# Altium PCB E77R.PcbDoc
Units mm, origin at the board's own origin, x right, y up, seen from the top; angles counter-clockwise.
Board outline 25 x 100 mm, 2 copper layers (Top Layer, Bottom Layer); 52 components, 33 nets, 183 pads, 226 vias.
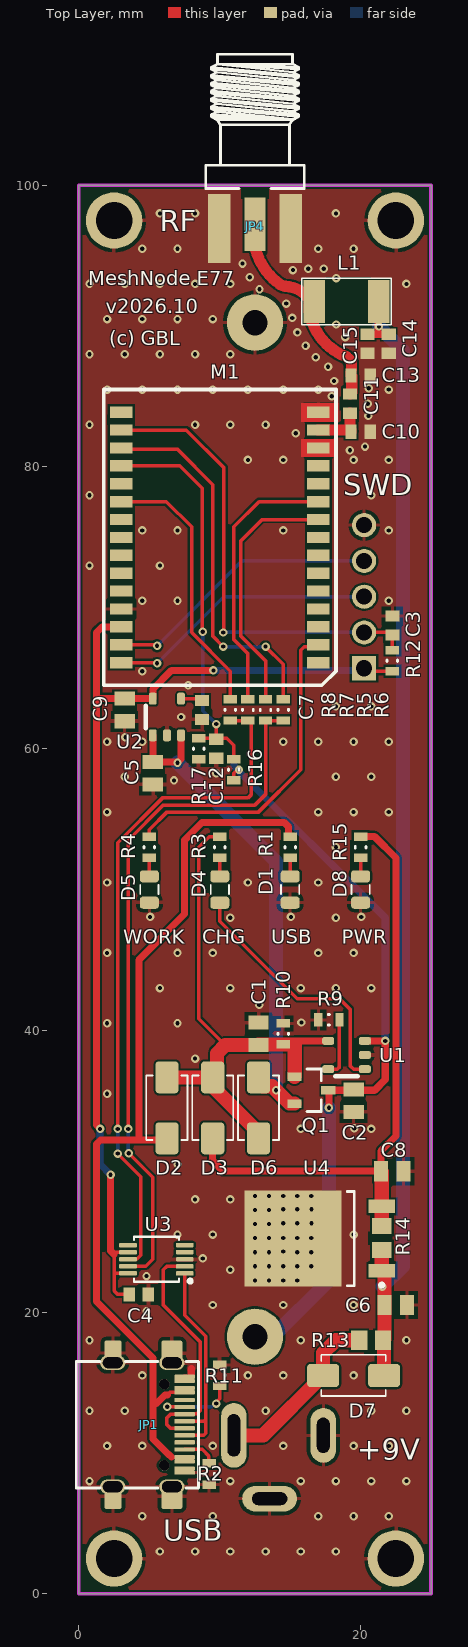
[diagram p0: Top Layer view]
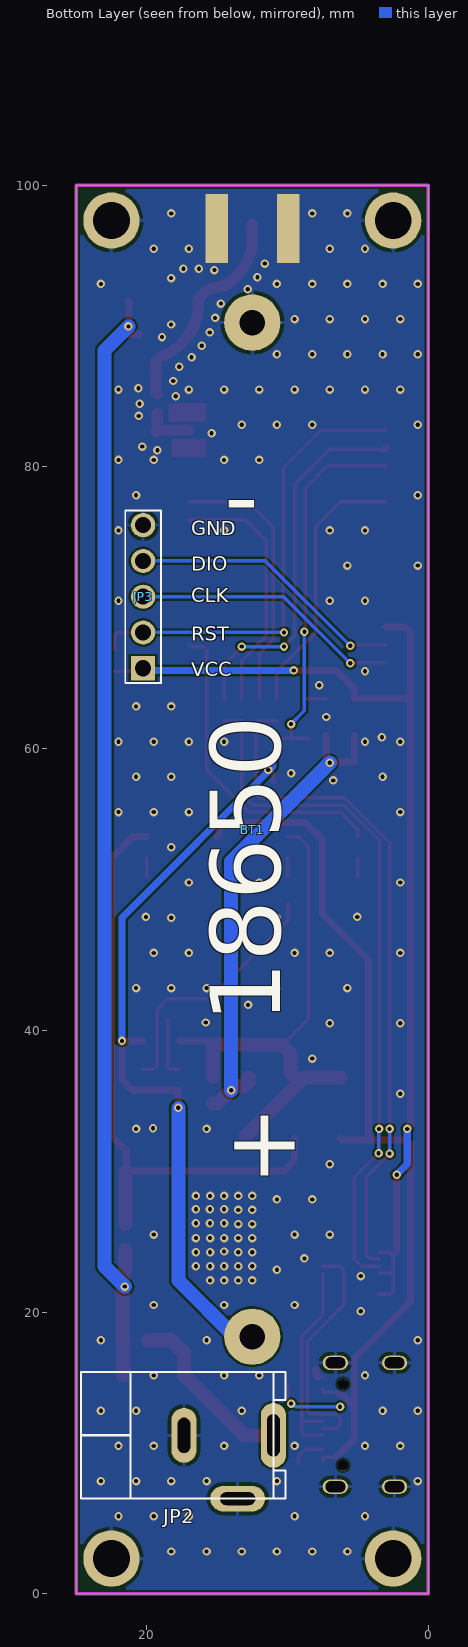
[diagram p1: Bottom Layer view, seen from below]
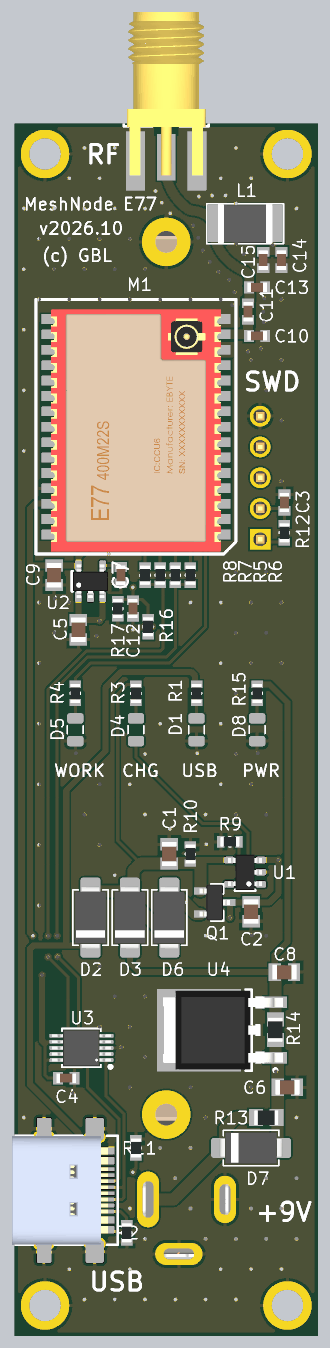
[diagram p2: 3D render of the assembled board from above, using the file's embedded part models]
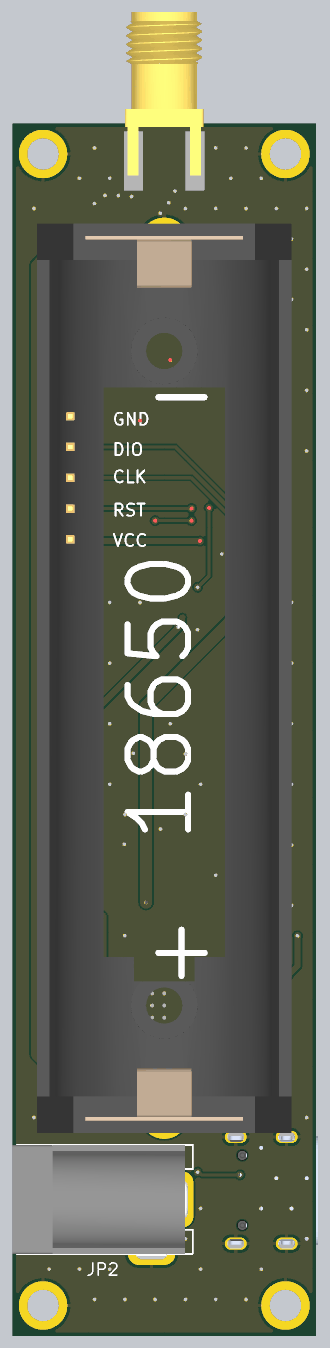
[diagram p3: 3D render of the assembled board from below, using the file's embedded part models]

## Layer stack, top to bottom
Top Solder: solder mask 0.0102, Solder Resist, Dk 3.5
Top Layer: signal copper 0.0356
Dielectric 1: dielectric 0.32, FR-4, Dk 4.8
Bottom Layer: signal copper 0.0356
Bottom Solder: solder mask 0.0102, Solder Resist, Dk 3.5

## Board outline
0,0 0,100 25,100 25,0

## Design rules (kind name [scope] priority, off if disabled: settings)
Clearance [All] p1: gap=0.15 ignorepadtopadclearanceinfootprint=FALSE
ComponentClearance ComponentClearance_1 [InComponent('JP3') vs InComponent('BT1')] p1: gap=-10 collisioncheckmode=3 verticalgap=-10 showdistances=FALSE
ComponentClearance [All] p2: gap=0.254 collisioncheckmode=3 verticalgap=0.254 showdistances=FALSE
HoleSize [All] p1: absolutevalues=TRUE maxlimit=5 minlimit=0.025 maxpercent=80.000 minpercent=20.000
MinimumSolderMaskSliver [All] p1: minsoldermaskwidth=0.05
PolygonConnect PolygonConnect_3 [InComponent('U4') vs IsNamedPolygon('GND_L01_P001')] p1: connectstyle=Direct reliefconductorwidth=0.254 reliefentries=4 polygonreliefangle="90 Angle" airgapwidth=0.254
PolygonConnect PolygonConnect_2 [InComponent('JP4') or InComponent('C14') or InComponent('C15') or InComponent('C13') or InComponent('C10') vs IsNamedPolygon('GND_L01_P001') Or IsNamedPolygon('GND_L02_P000')] p2: connectstyle=Direct reliefconductorwidth=0.254 reliefentries=4 polygonreliefangle="90 Angle" airgapwidth=0.254
PolygonConnect PolygonConnect_1 [All vs IsNamedPolygon('GND_L01_P001') Or IsNamedPolygon('GND_L02_P000')] p3: thpad.connectstyle=Relief thpad.reliefconductorwidth=0.254 thpad.reliefentries=4 thpad.polygonreliefangle="90 Angle" thpad.airgapwidth=0.254 smdpad.connectstyle=Relief smdpad.reliefconductorwidth=0.254 smdpad.reliefentries=4 smdpad.polygonreliefangle="90 Angle" smdpad.airgapwidth=0.254 via.connectstyle=Direct via.reliefconductorwidth=0.254 via.reliefentries=4 via.polygonreliefangle="90 Angle" via.airgapwidth=0.254
PolygonConnect [All] p4: connectstyle=Relief reliefconductorwidth=0.254 reliefentries=4 polygonreliefangle="90 Angle" airgapwidth=0.254
RoutingVias [All] p1: holewidth=0.711 width=1.27 viastyle="Through Hole" minholewidth=0.711 minwidth=1.27 maxholewidth=0.711 maxwidth=1.27
SilkToSilkClearance [All] p1: silktosilkclearance=0.1
SilkToSolderMaskClearance [IsPad] p1: minsilkscreentomaskgap=0.05 clearancetoexposedcopper=TRUE
SolderMaskExpansion [All] p1: expansion=0 istentingtop=FALSE
SupplyNets "Schematic Supply Nets_6" [InNet('VBUS')] p1: voltage=0.000
SupplyNets "Schematic Supply Nets_5" [InNet('+5V')] p2: voltage=0.000
SupplyNets "Schematic Supply Nets_4" [InNet('V_IN')] p3: voltage=0.000
SupplyNets "Schematic Supply Nets_3" [InNet('V_BATT')] p4: voltage=0.000
SupplyNets "Schematic Supply Nets_2" [InNet('+9V')] p5: voltage=0.000
SupplyNets "Schematic Supply Nets_1" [InNet('VCC')] p6: voltage=0.000
SupplyNets "Schematic Supply Nets" [InNet('GND')] p7: voltage=0.000
Width [All] p1: maxlimit=2 minlimit=0.2 preferedwidth=0.25
25 further rules are at their usual default settings.

## Classes and differential pairs
component class E77R: BT1 C1 C2 C3 C4 C5 C6 C7 C8 C9 C10 C11 C12 C13 C14 C15 D1 D2 D3 D4 D5 D6 D7 D8 JP1 JP2 JP3 JP4 L1 M1 Q1 R1 R3 R6 R9 R13 R16 R17 U1 U2 U3 U4

## Components (designator, comment, footprint, x,y, rotation, side; value= is the part's Value field where it differs from the comment)
BT1 "18650" 18650 12.5,54.25 r90 bottom locked
C1 "10uF" C-0805 12.75,39.75 r90 top
C2 "10uF" C-0805 19.5,35 r90 top
C3 "100nF" C-0603 22.25,68.75 r270 top
C4 "100nF" C-0603 4.25,21.25 r180 top
C5 "10uF" C-0805 5.25,58.25 r270 top
C6 "10uF" C-0805 22.5,20.5 r0 top
C7 "nc" C-0603 8.75,62.75 r270 top
C8 "10uF" C-0805 22.25,30 r0 top
C9 "10uF" C-0805 3.25,62.75 r270 top
C10 "nc" C-0603 20,82.5 r180 top
C11 "100pF" C-0603 19.25,84.5 r90 top
C12 "100nF" C-0603 9.75,60 r90 top
C13 "nc" C-0603 20,86.5 r180 top
C14 "100pF" C-0603 22,88.75 r270 top
C15 "100nF" C-0603 20.5,88.75 r90 top
D1 "DLED" LED0805 15,50 r270 top locked
D2 "SS14" D-SMA 6.25,34.5 r90 top
D3 "SS14" D-SMA 9.5,34.5 r90 top
D4 "DLED" LED0805 10,50 r270 top locked
D5 "DLED" LED0805 5,50 r270 top locked
D6 "SS14" D-SMA 12.75,34.5 r90 top
D7 "SS14" D-SMA 19.5,15.5 r0 top
D8 "DLED" LED0805 20,50 r270 top locked
JP1 "L-KLS1-5473" USB_C_SMD_SLOT 7.5,12 r270 top locked
JP2 "POWER" DC-140-003 11,11.25 r90 bottom
JP3 "HEADER 5" PLS1-5 20.25,65.71 r90 bottom locked
JP4 "EM-SA071-GGT" SMA_F_EDGE 12.5,98.5 r270 top locked
L1 "L" SCI1812 19,91.75 r180 top
M1 "E77-400M22S" E77XX-M22 10,75 r180 top locked
Q1 "IRLML6401" SOT-23 16.5,35.75 r0 top
R1 "1k" R-0603 15,53 r90 top
R2 "nc" R-0603 9.25,8.5 r270 top
R3 "1k" R-0603 10,53 r270 top
R4 "470" R-0603 5,53 r90 top
R5 "nc" R-0603 13.25,62.75 r270 top
R6 "nc" R-0603 14.5,62.75 r270 top
R7 "nc" R-0603 12,62.75 r270 top
R8 "nc" R-0603 10.75,62.75 r270 top
R9 "4k7" R-0603 17.75,40.75 r0 top
R10 "10k" R-0603 14.5,39.75 r270 top
R11 "nc" R-0603 10,15.5 r90 top
R12 "10k" R-0603 22.25,66.25 r270 top
R13 "nc" R-0805 20.75,18 r180 top
R14 "nc" R-0805 21.5,25.25 r270 top
R15 "1k" R-0603 20,53 r90 top
R16 "1M" R-0603 11,58.5 r270 top
R17 "1M" R-0603 8.5,60 r90 top
U1 "MCP73831-2ATI/OT" SOT-23-5 19,38.25 r180 top value={Value}
U2 "LP5907MFX-3.0" SOT-23-5 6.25,62.25 r90 top
U3 "CH340E" MSOP-10 5.5,23.75 r90 top value={Value}
U4 "78M05" DPAK3 15.195,25.22 r180 top

## Footprints (in the part's own frame and the unit in brackets; to place one, negate y for a bottom-side part, rotate by r counter-clockwise, add the part's x,y. Pads: shape width x height; smd on the part's side, far side on the other; paste and mask are expansions set on the pad)
18650 [mm]
  round 4 hole 1.8: 1(-36,0) 2(36,0)
  body extent -37.5,-10.5 37.5,10.5, height 21
C-0603 [mm] "Chip Capacitor, 2-Leads, Body 1,60x0,80mm, IPC Medium Density"
  rect 0.8x1 smd: 1(-0.675,0) 2(0.675,0)
  body extent -0.8,-0.4 0.8,0.4, height 0.8
C-0805 [mm] "Chip Capacitor, 2-Leads, Body 2,00x1,25mm, IPC Medium Density"
  rect 1x1.45 smd: 1(-0.8,0) 2(0.8,0)
  body extent -1,-0.62 1,0.63, height 1.25
D-SMA [mm] "Diode, Molded Body; 4.315 mm L X 2.605 mm W X 2.41 mm H body"
  rrect30% 2.27x1.65 smd: 1(-2.165,0) 2(2.165,0)
  silkscreen extent -2.29,-1.46 2.29,1.46, body extent -2.61,-1.3 2.61,1.3, height 2.41
DC-140-003 [mm]
  oval 4.6x1.8 hole 0.9 slot 3 at 0 deg: 1(0,0)
  oval 3.9x1.8 hole 0.9 slot 2.5 at 0 deg: 2(0,6.35)
  oval 1.8x3.9 hole 0.9 slot 2.5 at 90 deg: 3(-4.5,2.54)
  silkscreen extent -4.5,-0.85 4.5,13.65, body extent -4.76,-0.45 4.5,14, height 11.85
DPAK3 [mm]
  rect 1.9x0.95 smd: 1(-6.305,2.28) 2(-6.305,-2.28)
  rect 6.9x6.8 smd: 3(-0.005,0)
  silkscreen extent -6.43,-3.35 -3.85,3.43, body extent -6.95,-3.25 2.95,3.25, height 2.32
E77XX-M22 [mm]
  rect 1.6x0.8 smd: 1(-7,8.89) 2(-7,7.62) 3(-7,6.35) 4(-7,5.08) 5(-7,3.81) 6(-7,2.54) 7(-7,1.27) 8(-7,0) 9(-7,-1.27) 10(-7,-2.54) 11(-7,-3.81) 12(-7,-5.08) 13(-7,-6.35) 14(-7,-7.62) 15(-7,-8.89) 16(7,-8.89) 17(7,-7.62) 18(7,-6.35) 19(7,-5.08) 20(7,-3.81) 21(7,-2.54) 22(7,-1.27) 23(7,0) 24(7,1.27) 25(7,2.54) 26(7,3.81) 27(7,5.08) 28(7,6.35) 29(7,7.62) 30(7,8.89)
  silkscreen extent -8.25,-10.5 8.25,10.5, body extent -7,-9.68 7,10.3, height 2.7
LED0805 [mm] "LED, Chip; 2.00 mm L X 1.25 mm W X 0.80 mm H body"
  rrect51% 0.86x1.35 smd: 1(-0.935,0) 2(0.935,0)
  silkscreen extent -0.33,-0.65 0.33,0.65, body extent -1,-0.63 1,0.63, height 0.25
MSOP-10 [mm] "Small Outline Pkg (SOP), 0.50 mm pitch; 10 pin, 3.00 mm L X 3.00 mm W X 1.10 mm H body"
  rrect52% 0.31x1.27 smd: 1(-1,-2.015) 2(-0.5,-2.015) 3(0,-2.015) 4(0.5,-2.015) 5(1,-2.015) 6(1,2.015) 7(0.5,2.015) 8(0,2.015) 9(-0.5,2.015) 10(-1,2.015)
  silkscreen extent -1.68,-2.53 1.6,1.6, body extent -1.5,-2.42 1.5,2.42, height 1.1
PLS1-5 [mm] "Header, Vertical, 2.54 mm pitch; 0.70 mm lead width, 5 pins, 1 row, 5 pins per row, 11.43 mm L X 2.54 mm W X 7.54 mm H body"
  rect 1.71x1.71 hole 1.14 paste-2539.97: 1(0,0)
  round 1.71 hole 1.14 paste-2539.97: 2(2.54,0) 3(5.08,0) 4(7.62,0) 5(10.16,0)
  silkscreen extent -1.04,-1.27 11.2,1.27, body extent -0.64,-1.27 10.79,1.27, height 7.54
R-0603 [mm] "Chip Resistor, 2-Leads, Body 1,60x0,82mm, IPC Medium Density"
  rect 0.6x0.95 smd: 1(-0.75,0) 2(0.75,0)
  silkscreen extent -0.05,-0.38 0.05,0.38, body extent -0.8,-0.4 0.8,0.4, height 0.45
R-0805 [mm] "Chip Resistor, 2-Leads, Body 2,00x1,25mm, IPC Medium Density"
  rect 1.15x1.4 smd: 1(-0.85,0) 2(0.85,0)
  body extent -1,-0.6 1,0.6, height 0.45
SCI1812 [mil]
  rect 60x120 smd: 1(-90,0) 2(90,0)
  silkscreen extent -125,-65 125,65, body extent -89,-63 89,63, height 98
SMA_F_EDGE [mm] "SMA End Launch Jack for 1.58mm PCB, 50 Ohm, Flat Tab Contact"
  rect 3.81x1.5 smd: 1(1.27,0)
  rect 4.9x1.6 smd: 2(1.575,2.54) 2(1.575,-2.54)
  rect 4.9x1.6 smd far side: 2(1.575,2.54) 2(1.575,-2.54)
  silkscreen extent -10.81,-3.5 -1.28,3.5, body extent -10.73,-3.25 2.77,3.25, height 3.7
SOT-23 [mm]
  rect 1x0.6 smd: 1(-1.2,0.95) 2(-1.2,-0.95) 3(1.2,0)
  silkscreen extent -0.3,-1.5 0.7,1.5, body extent -1.25,-1.5 1.25,1.5, height 1.2
SOT-23-5 [mm]
  rrect50% 0.85x0.55 smd mask+0.06: 1(-1.3,1) 2(-1.3,0) 3(-1.3,-1) 4(1.3,-1) 5(1.3,1)
  silkscreen extent -0.8,1.5 0.8,1.5, body extent -1.4,-1.45 1.4,1.45, height 1.45
USB_C_SMD_SLOT [mm] "USB 3.1 Type C"
  rrect20% 1.8x1.5 smd mask+0.07: 1(-5.08,-0.9) 1(5.08,-0.9)
  rrect20% 1.8x1.2 smd mask+0.07: 1(-5.08,-5.08) 1(5.08,-5.08)
  oval 1x1.8 hole 0.8 slot 1.4 at 90 deg: 1(-4.4,-0.9) 1(-4.4,-5.1) 1(4.4,-0.9) 1(4.4,-5.1)
  rrect30% 0.3x1.45 smd paste-2 mask+0.07: A1(-3.1,0) A4(-2.6,0) A9(2.6,0) A12(3.4,0) B1(3.1,0) B4(2.3,0) B9(-2.3,0) B12(-3.4,0)
  rrect30% 0.3x1.45 smd mask+0.07: A5(-1.25,0) A6(-0.25,0) A7(0.25,0) A8(1.25,0) B5(1.75,0) B6(0.75,0) B7(-0.75,0) B8(-1.75,0)
  round 0.75 hole 0.75 unplated paste-2539.97 mask+0.07: MH(-2.885,-1.44) MH(2.885,-1.44)
  silkscreen extent -4.5,-7.69 4.5,1, body extent -4.47,-7.7 4.47,0.2, height 3.2

## Part data
BT1: library part Battery, "Multicell Battery", LatestRevisionDate=17-Jul-2002, LatestRevisionNote="Re-released for DXP Platform.", PackageDescription="Battery; 2 Leads", PackageReference=BAT-2, Published=24-Mar-1999, Publisher="Altium Limited"
C1 C2 C3 C4 C5 C6 C7 C8 C9 C10 C11 C12 C13 C14 C15: library part CAPN, Voltage=50V, Вид=Конденсатор, Точність/група=NP0
D2 D3 D6 D7: library part DIODSH, Вид=Діод
JP4: library part SMA, "SMA Female R/A PCB Mount", Вид=Роз'єм
Q1: library part MOSF-P, Вид=Транзистор
R1 R2 R3 R4 R5 R6 R7 R8 R9 R10 R11 R12 R13 R14 R15 R16 R17: library part RES, Вид=Резистор, Точність/група=5%
U1: Man#Part Num#=TPS61023DRLT, Manufacturer="Texas Instruments", Package=SOT-563, Temperature Range="-40°C ~ 125°C (TJ)", Component Type=SMD, Footprint Part=IC-package.PcbLib, IC Type=PMIC, Library Part=IC`s.SchLib, Mounting  Method=SMD, Part Number=MCP73831-2ATI/OT, Part Type=IC, Suplier 1=https://www.digikey.com.au/en/products/detail/texas-instruments/TPS61023DRLT/11310622?s=N4IgTCBcDaICoAUDKA2AjABjAZgCICUAZOEAXQF8g, URL=https://www.ti.com/general/docs/suppproductinfo.tsp?distId=10&gotoUrl=https%3A%2F%2Fwww.ti.com%2Flit%2Fgpn%2Ftps61023
U2: library part LP5907, "250mA Low-Dropout Regulator", Вид=Мікросхема
U4: library part 78M08, Вид=Мікросхема
D1 D4 D5 D8: Вид=Світлодіод
JP1 U3: Mounting  Method=SMD
JP2 JP3: Вид=Роз'єм
L1: Вид=Індуктивність

## Free pads (board coordinates)
  round 4 hole 2.6: 0(2.5,2.5) 0(2.5,97.5) 0(22.5,2.5) 0(22.5,97.5)

## Via types
v1: diameter 0.6, hole 0.3, Top Layer to Bottom Layer, tented both sides, 226 vias

## Nets (pads, with @x,y where several pads share a name; then routed paths per layer and width w, separated by ;. In a path a pad name is that pad's centre, name@x,y a point inside that pad or via, vN(x,y) a via of type N, cw(c..) or ccw(c..) an arc to the next point about the centre after c; other vN are vias at no path point)
+5V: C8.1 D3.1 R14.1 R15.2 U4.2 | length 43.4
  Top Layer w0.5: D3.1 9.5,30.75 10.25,30 C8.1 21.45,31.45 22.5,32.5 22.5,52.25 21,53.75 R15.2
  Top Layer w1: R14.1@21.5,26.25 U4.2 C8.1@21.5,29.95
+9V: C6.1 C14.1 C15.2 D7.2 L1.1 R13.1 R14.2 U4.1 | length 82.3
  Top Layer w0.25: R13.1 R13.1@21.7,18.1
  Top Layer w0.5: C15.2 21.25,89.425 ; L1.1 21.25,91.714 21.25,89.425 ; C14.1 21.25,89.425
  Top Layer w1: R14.2 U4.1 21.7,22.74 R13.1@21.7,18.1 ; D7.2 R13.1@21.665,18
  Bottom Layer w1: v1(21.299,89.983) 23,88.283 23,23.25 v1@21.554,21.804
  other v1: 21.549,21.808
BATT_LEVEL: C12.2 M1.19 R16.1 R17.2 | length 28.3
  Top Layer w0.25: M1.19 7.17,80.08 8.75,78.5 v1@8.75,68.316 ; R17.2 C12.2@9.75,60.75 ; C12.2 C12.2@9.75,60.75 ; v1(9.75,61.75) C12.2@9.75,60.75 ; R16.1 11,60.25 10.5,60.75 C12.2@9.75,60.75
  Bottom Layer w0.25: v1(8.799,68.308) 8.799,62.701 v1(9.75,61.75)
DN: JP1.A7 JP1.B7 U3.2 | length 17.1
  Top Layer w0.25: JP1.A7 6.5,11.75 6.25,12 6.25,12.5 6.5,12.75 JP1.B7 7.525,12.775 8.375,12.775 8.6,13 8.6,17.9 6,20.5 6,23 6.25,23.25 U3.2
DP: JP1.A6 JP1.B6 U3.1 | length 15.1
  Top Layer w0.25: JP1.B6 8.854,11.25 9,11.396 9,12.396 ; JP1.A6 8.854,12.25 9,12.396 ; U3.1 7.515,19.78 9,18.295 9,12.396
GND: BT1.2 C1.2 C2.1 C3.1 C4.1 C5.2 C6.2 C7.2 C8.2 C9.2 C10.1 C12.1 C13.1 C14.2 C15.1 D1.2 D5.2 D8.2 JP1.1 JP1.A1 JP1.A12 JP1.B1 JP1.B12 JP2.2 JP2.3 JP3.5 JP4.2 M1.13 M1.15 M1.27 pad.0 R2.2 R9.1 R10.1 R11.2 R17.1 U1.2 U2.2 U3.3 U4.3 | length 1
  Top Layer w0.3: JP1.B12 JP1.B12@7.875,15.4
  Top Layer w0.5: JP1.B12@7.875,15.4 7.975,15.5 7.975,15.875 8,15.9 8,16
  other v1: 5.75,3 8.25,3 10.75,3 13.25,3 15.75,3 18.25,3 4.5,5.5 9.5,5.5 17,5.5 19.5,5.5 22,5.5 0.75,8 10.75,8 15.75,8 18.25,8 20.75,8 23.25,8 2,10.5 4.5,10.5 9.5,10.5 14.5,10.5 19.5,10.5 22,10.5 0.75,13 3.25,13 13.25,13 20.75,13 23.25,13 4.5,15.5 12,15.5 14.5,15.5 19.5,15.5 0.75,18 15.75,18 23.25,18 4.799,20.058 9.5,20.5 14.5,20.5 19.5,20.5 12.5,22.25 13.5,22.25 14.5,22.25 15.5,22.25 4.799,22.558 10.75,23 12.5,23.25 13.5,23.25 14.5,23.25 15.5,23.25 16.5,23.25 8.799,23.808 12.5,24.25 13.5,24.25 15.5,24.25 16.5,24.25 14.506,24.298 12.5,25.25 13.5,25.25 14.5,25.25 15.5,25.25 16.5,25.25 7,25.5 9.5,25.5 19.5,25.5 12.5,26.25 13.5,26.25 14.506,26.298 15.506,26.298 16.506,26.298 12.5,27.25 13.5,27.25 14.506,27.298 15.506,27.298 16.506,27.298 8.25,28 10.75,28 12.5,28.25 13.5,28.25 14.5,28.25 15.5,28.25 16.5,28.25 7,30.5 15.75,33 20.75,33 19.549,33.058 2,35.5 8.25,38 2,40.5 7,40.5 15.799,40.558 12.799,41.808 5.75,43 10.75,43 15.75,43 18.25,43 20.75,43 2,45.5 7,45.5 9.5,45.5 17,45.5 19.5,45.5 10.75,48 18.25,48 5.049,48.058 15.049,48.058 20.049,48.058 2,50.5 12,50.5 17,50.5 18.25,53 2,55.5 17,55.5 19.5,55.5 22,55.5 6.75,57.75 3.25,58 18.25,58 20.75,58 9.75,58.25 2,60.5 4.5,60.5 14.5,60.5 17,60.5 19.5,60.5 22,60.5 3.299,60.808 7.25,62.25 18.25,63 20.75,63 7.75,64.5 4.5,65.5 4.5,70.5 7,70.5 22,70.5 0.75,73 5.75,73 4.5,75.5 7,75.5 14.5,75.5 22,75.5 0.75,78 20.75,78 12,80.5 14.5,80.5 19.5,80.5 22,80.5 19.24,81.193 20.31,81.449 15.393,82.394 0.75,83 8.25,83 10.75,83 13.25,83 20.557,83.624 20.501,84.497 17.943,85.02 2,85.5 4.5,85.5 7,85.5 9.5,85.5 12,85.5 14.5,85.5 17,85.5 22,85.5 20.583,85.594 18.118,86.106 17.691,87.12 16.815,87.786 0.75,88 3.25,88 5.75,88 8.25,88 10.75,88 16.09,88.613 18.912,89.224 15.517,89.552 18.268,90.116 2,90.5 4.5,90.5 7,90.5 9.5,90.5 15.145,90.587 14.725,91.603 12.821,92.616 0.75,93 3.25,93 5.75,93 8.25,93 10.75,93 23.25,93 18.264,93.415 12.135,93.475 15.193,93.982 16.288,94.081 17.388,94.081 11.614,94.444 4.5,95.5 7,95.5 17,95.5 19.5,95.5 5.75,98 8.25,98 18.25,98
LED: M1.2 R4.2 | length 22.9
  Top Layer w0.25: R4.2 5,54.25 6.25,55.5 12.75,55.5 15.75,58.5 15.75,67 16,67.25 16.87,67.25 M1.2
NetC1_1: C1.1 D2.2 D3.2 D6.1 Q1.1 R3.1 R10.2 U1.4 | length 37.4
  Top Layer w0.25: R3.1 9.25,53.75 8.5,53 8.5,40.836 9.886,39.45 10.386,38.95
  Top Layer w0.5: 15.25,39.25 U1.4
  Top Layer w1: D2.2 8.835,36.665 D6.1@12.958,32.543 ; D3.2 9.801,36.966 9.801,38.364 10.386,38.95 C1.1 ; C1.1@12.75,39 15.323,39 15.323,36.723 Q1.1
NetC7_1: C7.1 U2.4 | length 1.5
  Top Layer w0.25: U2.4 C7.1@8.775,63.55
NetC10_2: C10.2 C11.1 M1.14 | length 3.6
  Top Layer w0.8: M1.14 C10.2@19.195,82.62 ; C11.1 19.25,82.675 19.325,82.6 C10.2
NetC11_2: C11.2 C13.2 JP4.1 L1.2 | length 15.3
  Top Layer w0.8: JP4.1 12.484,95.725 ccw(c16.898,96.63) 14.25,92.984 ccw(c14.719,93.632) 14.658,92.835 cw(c14.476,90.322) 14.66,92.835 cw(c14.476,90.322) 15.84,92.44 cw(c15.188,91.429) L1.2@16.39,91.482 ; L1.2@16.351,91.48 ccw(c17.782,91.282) 16.358,91.036 16.45,90.626 ccw(c20.504,91.752) 19.006,87.821 19.121,87.705 19.356,87.471 19.356,87.139 19.356,87.12 C13.2 ; C11.2 19.368,85.293 C13.2@19.368,86.457
NetD1_1: D1.1 R1.1 | length 1.3
  Top Layer w0.25: D1.1 R1.1
NetD4_1: D4.1 R3.2 | length 1.3
  Top Layer w0.25: D4.1 R3.2
NetD4_2: D4.2 U1.1 | length 18.3
  Top Layer w0.25: D4.2 10,47.75 15.5,42.25 18.5,42.25 19.25,41.5 19.25,37.5 19.5,37.25 U1.1
NetD5_1: D5.1 R4.1 | length 1.3
  Top Layer w0.25: D5.1 R4.1
NetD7_1: D7.1 JP2.1 R13.2 | length 12.6
  Top Layer w1: JP2.1 13.085,11.25 D7.1 17.335,17.085 18.25,18 R13.2
NetD8_1: D8.1 R15.1 | length 1.3
  Top Layer w0.25: D8.1 R15.1
NetJP1_A5: JP1.A5 R11.1 | length 6.2
  Top Layer w0.25: v1(6.265,13.275) 6.277,13.262 7.488,13.262 JP1.A5 ; v1(9.75,13.5) 9.75,13.595 10,13.845 R11.1
  Bottom Layer w0.25: v1@6.25,13.25 6.275,13.275 9.43,13.275 9.655,13.5 v1(9.75,13.5) ; v1@6.265,13.265 v1(6.265,13.275)
NetJP1_B5: JP1.B5 R2.1 | length 2.5
  Top Layer w0.25: JP1.B5 8.75,10.25 9.221,9.779 9.221,9.279 R2.1
NetR9_2: R9.2 U1.5 | length 4.2
  Top Layer w0.25: U1.5 18.354,37.25 18.5,37.396 R9.2
NRST: C3.2 JP3.2 M1.17 R12.1 | length 33.3
  Top Layer w0.25: M1.17 7.63,82.62 10.299,79.951 10.299,68.299 v1(10.25,68.25) ; JP3.2 22.075,68.25 C3.2 R12.1
  Bottom Layer w0.25: v1(10.25,68.25) JP3.2
PA2: M1.9 R5.1 | length 18.1
  Top Layer w0.25: R5.1 13.25,66.25 11.5,68 11.5,74.75 13.02,76.27 M1.9
PA3: M1.10 R7.1 | length 19.4
  Top Layer w0.25: R7.1 12,66.75 11,67.75 11,75.75 12.79,77.54 M1.10
PA9: M1.18 R6.1 | length 26.7
  Top Layer w0.25: M1.18@3.1,81.25 7,81.25 9.5,78.75 9.5,68 v1(10.25,67.25) ; v1(13.25,67.25) 14.5,66 R6.1
  Top Layer w0.5: M1.18 M1.18@3.1,81.25
  Bottom Layer w0.25: v1(10.25,67.25) v1(13.25,67.25)
PA10: M1.21 R8.1 | length 19.1
  Top Layer w0.25: M1.21 6.21,77.54 8,75.75 8,68.25 10.75,65.5 R8.1
RXD: R7.2 R8.2 U3.8 | length 48.6
  Top Layer w0.25: v1(2.75,31.25) 4.395,29.605 4.395,24.028 4.147,23.78 3.515,23.78 U3.8 ; v1(2.75,33) 2.75,53.316 5.934,56.5 12,56.5 12.25,56.75 12.25,61.825 12.075,62 R8.2
  Bottom Layer w0.25: v1(2.75,31.25) v1(2.75,33)
SWCLK: JP3.3 M1.30 | length 19.2
  Top Layer w0.25: M1.30 v1@5.5,66.11
  Bottom Layer w0.25: v1(5.549,66.058) 10.281,70.79 JP3.3
SWDIO: JP3.4 M1.29 | length 19.7
  Top Layer w0.25: M1.29 v1@5.5,67.38
  Bottom Layer w0.25: v1(5.549,67.308) 11.571,73.33 JP3.4
TXD: R5.2 R6.2 U3.9 | length 50
  Top Layer w0.25: U3.9 4.75,23.25 5.25,23.75 5.25,29.563 v1(3.532,31.282) ; v1(3.5,33) 3.5,53.5 6,56 12.5,56 13.25,56.75 R5.2 R6.2
  Bottom Layer w0.25: v1(3.5,33) 3.516,32.984 3.516,31.297 v1(3.532,31.282)
V_BATT: BT1.1 C2.2 Q1.3 R16.2 U1.3 | length 54.2
  Top Layer w0.25: R16.2 11,58.25 v1@11.25,58.5
  Top Layer w0.5: v1(17.75,34.5) 17.75,35.75 21,35.75 21.75,36.5 v1(21.75,39.25) U1.3
  Bottom Layer w0.5: 11,59.25 11.019,59.231 11.019,58.731 21.75,48 v1(21.75,39.25)
  Bottom Layer w1: BT1.1 13.75,18.25 17.75,22.25 v1(17.75,34.5)
  other v1: 11.365,58.492
V_IN: C5.1 D6.2 Q1.2 U2.1 U2.3 | length 35.4
  Top Layer w0.5: U2.1 C5.1 6.923,59.05 6.973,59 v1(7,59) 7,59.027 7.25,59.277 U2.3
  Top Layer w1: D6.2 12.75,36.355 13.075,36.03 13.72,36.03 v1(14,35.75) 14.95,34.8 Q1.2
  Bottom Layer w1: v1(7,59) 14,52 v1(14,35.75)
VBUS: D2.1 JP1.A4 JP1.A9 JP1.B4 JP1.B9 R1.2 | length 65.2
  Top Layer w0.25: 6.3,14.11 6.3,14.154 6.446,14.3 JP1.B9 JP1.A4 ; 6.561,9.711 6.571,9.7 JP1.B4 JP1.A9
  Top Layer w0.5: D2.1 6.133,32.218 4.25,32.218 ; 6.3,14.11 6.11,14.11 5.5,13.5 5.25,13.5 ; 6.561,9.711 6.381,9.89 6.36,9.89 5.25,11 5.25,13.5 ; R1.2 14.921,53.75 14.871,53.8 14.871,54.457 14.579,54.75 8.75,54.75 7.5,53.5 7.5,48.25 4.25,45 4.25,32.218 ; 4.25,32.218 1.543,32.218 1.25,31.925 1.25,20.75 5.25,16.75 5.25,13.5
VCC: C4.2 C9.1 JP3.1 M1.28 R12.2 U2.5 U3.7 U3.10 | length 74.8
  Top Layer w0.25: U3.10 2.5,22.75 ; U3.7 2.646,24.25 2.5,24.104 2.5,22.75 ; C4.2 2.75,21.25 2.5,21.5 2.5,22.75 ; JP3.1 20.46,65.5 R12.2
  Top Layer w0.5: v1(1.5,33) 1.5,33.027 1.25,33.277 1.25,63.6 ; v1(2.25,29.75) 2.25,24.354 2.5,24.104 ; M1.28 1.65,68.65 1.25,68.25 1.25,63.6 ; v1(9.549,65.558) 6.558,65.558 5.25,64.25 U2.5 C9.1 1.3,63.55 1.25,63.6
  Bottom Layer w0.5: v1(1.5,33) 1.5,30.5 v1(2.25,29.75) ; v1(9.549,65.558) 20.098,65.558 JP3.1
pads on no net: JP1.A8 JP1.B8 JP1.MH M1.1 M1.3 M1.4 M1.5 M1.6 M1.7 M1.8 M1.11 M1.12 M1.16 M1.20 M1.22 M1.23 M1.24 M1.25 M1.26 U3.4 U3.5 U3.6

## Polygon pours and split planes (outlines as drawn)
GND on Bottom Layer "GND_L02_P000" (solid, remove dead copper, pour order 0): 0,0 0,100 25,100 25,0
GND on Top Layer "GND_L01_P001" (solid, remove dead copper, pour order 1): 0,0 0,100 25,100 25,0

## Keep-outs
Keep-Out Layer:
  the board outline again, w0.254

## Other copper
Top Layer:
  rectangle net GND: 15.75,80.696 18.25,82.004
  rectangle net GND: 15.75,83.181 18.439,84.544
  pour cut-out: 3.75,53.232 3.75,49.758 5.804,49.758 5.804,53.121 5.625,53.3
  pour cut-out: 8.875,53.375 8.75,53.25 8.75,49.75 10.75,49.75 10.75,50.5 10.75,53.5
  pour cut-out: 14.27,53.506 14.27,50.25 15.62,50.25 15.62,53.407 15.52,53.506
  pour cut-out: 19.25,53.5 19.278,53.472 19.278,50.458 20.722,50.458 20.75,50.486 20.75,53.5
  pour cut-out: 20.25,18.75 20.25,17 21.5,17 21.5,18.75
  pour cut-out: 20.5,25.75 20.5,24.75 22.25,24.75 22.25,25.75
  pour cut-out: 2.05,84.44 3.95,84.44 3.95,84.2 3.95,82.9 2.1,82.9 2,83
  pour cut-out: 18.5,85 18.5,84 20,84 19.9,84.1 19.9,85.148
  pour cut-out: 17.5,93.5 17.5,90.115 17.461,90.076 17.537,90 20.75,90 20.75,93.5
  pour cut-out: 11.5,100 11.5,99 13.5,99 13.5,100

## Silkscreen, mask and mechanical layers (free items; w line width, h text height)
Top Overlay:
  text "RF" at 5.754,96.754 h1.5
  text "MeshNode E77" at 0.65,92.9 h1
  text "v2026.10" at 1.9,90.9 h1
  text "(c) GBL" at 2.15,88.65 h1
  text "SWD" at 18.754,78.004 h1.5
  text "WORK" at 3.15,46.15 h1
  text "CHG" at 8.75,46.15 h1
  text "USB" at 13.65,46.15 h1
  text "PWR" at 18.65,46.15 h1
  text "+9V" at 19.754,9.504 h1.5
  text "USB" at 6.004,3.754 h1.5
Bottom Overlay:
  text "-" at 14.5,75.501 h5
  text "GND" at 16.85,75.15 h1
  text "DIO" at 16.85,72.65 h1
  text "CLK" at 16.85,70.4 h1
  text "RST" at 16.85,67.65 h1
  text "VCC" at 16.85,65.15 h1
  text "18650" at 10.5,40.5 h5 r270
  text "+" at 14.5,29.667 h5